# Altium PCB TSAL_Control - copia.PcbDoc (part 2 of 2)
Units mm, origin at the board's own origin, x right, y up, seen from the top; angles counter-clockwise.
Board outline 110 x 55.6 mm, 4 copper layers (Top Layer, GND, PWR, Bottom Layer), stack 1.488 mm thick; 168 components, 78 nets, 452 pads, 56 vias.
Unrouted connection lines stored in the file: 329.
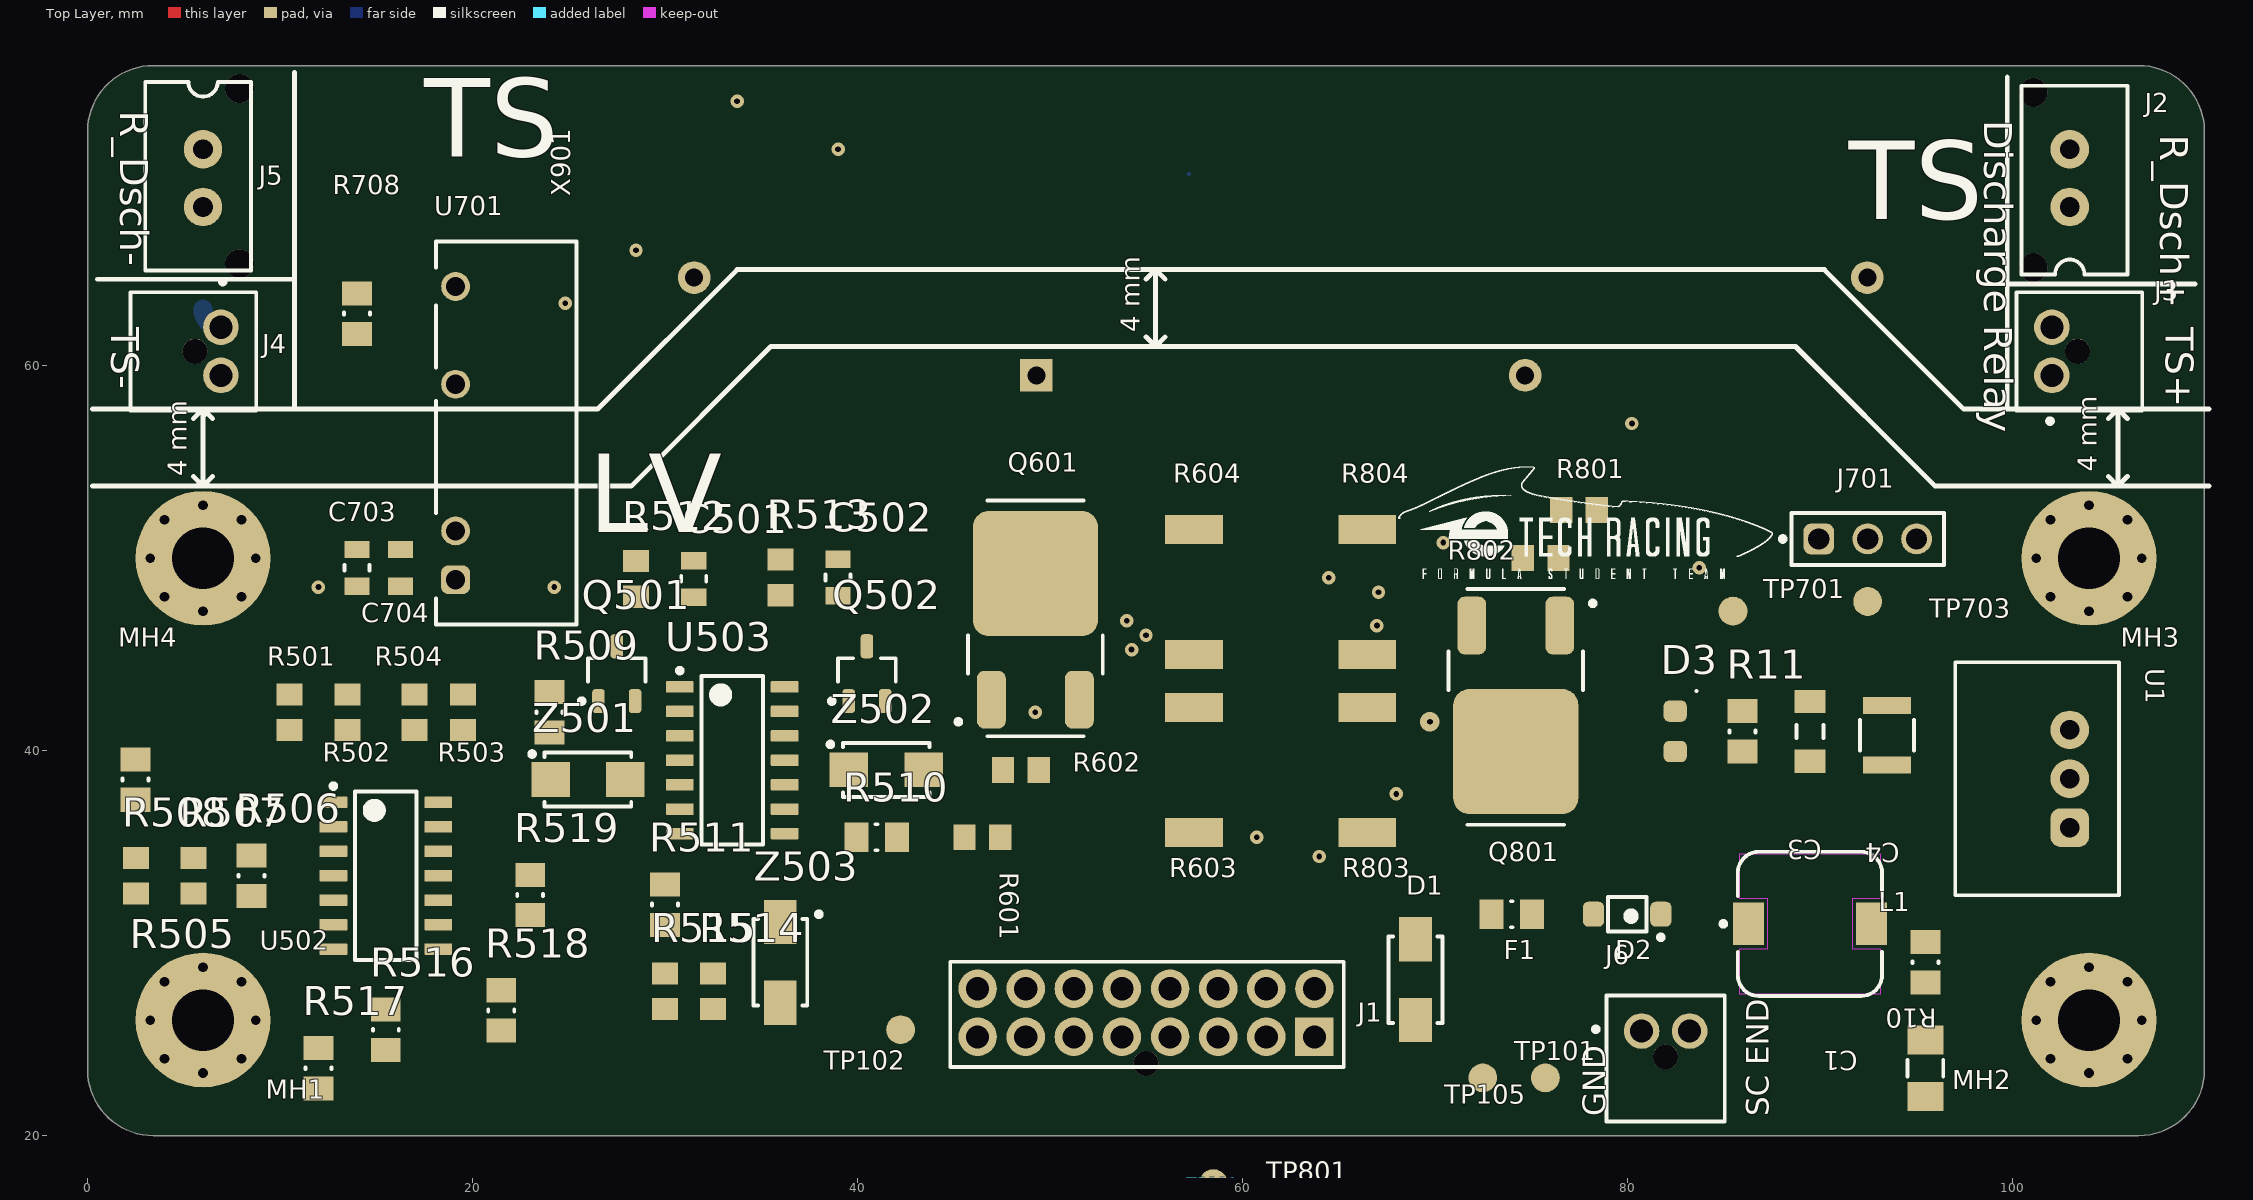
[diagram p0: Top Layer view]

## Part data (continued)
R507 R508 R514 R515 R601 R703 R709 R710 R801: library part CMP-00083-3, "Res Thick Film 0805 100 Ohm 1% 1/8W ±100ppm/°C Molded SMD SMD Paper Tape on Plastic Reel", Case Code (Metric)=2012, Case/Package=0805, Manufacturer 1=Bourns, Manufacturer Part Number 1=CR0805-FX-1000ELF, Max Operating Temperature=155°C, Max Power Dissipation=125mW, Min Operating Temperature=-55°C, Package Quantity=1, Resistance Tolerance=1%, Resistor Type="Thick Film", Temperature Coefficient=100ppm/°C, Voltage Rating=150V, .Creator=DR, Category="Chip SMD Resistors", ComponentLink1Description=https://datasheet.ciiva.com/11809/0900766b80fcdb72-11809178.pdf?src-supplier=RSComponents, ComponentLink1URL=https://datasheet.ciiva.com/11809/0900766b80fcdb72-11809178.pdf?src-supplier=RSComponents, ComponentLink2Description=https://datasheet.ciiva.com/6547/chpreztr-6547413.pdf?src-supplier=Digi-Key, ComponentLink2URL=https://datasheet.ciiva.com/6547/chpreztr-6547413.pdf?src-supplier=Digi-Key, ComponentLink3Description=https://datasheet.ciiva.com/6547/chpreztr-6547414.pdf?src-supplier=Digi-Key, ComponentLink3URL=https://datasheet.ciiva.com/6547/chpreztr-6547414.pdf?src-supplier=Digi-Key, ComponentLink4Description=https://datasheet.ciiva.com/6547/chpreztr-6547415.pdf?src-supplier=Digi-Key, ComponentLink4URL=https://datasheet.ciiva.com/6547/chpreztr-6547415.pdf?src-supplier=Digi-Key, ComponentLink5Description=https://datasheet.ciiva.com/9120/chpreztr-9120744.pdf?src-supplier=Avnet, ComponentLink5URL=https://datasheet.ciiva.com/9120/chpreztr-9120744.pdf?src-supplier=Avnet, Construction=Rectangular, Contact Plating=Tin, Depth=1.25mm, Design Item ID=R100-0805FTK, Features="Moisture Resistant", Height=0.5mm, Length=2mm, Military Standard=Not, Mount="Surface Mount", Number of Terminations=2, Packaging="Tape and Reel", Pins=2, Power rating=125mW, Pricing 1="1=0,05840, 10=0,03430, 25=0,01780, 100=0,00750, 250=0,00560, 500=0,00490, 3000=0,00470 (USD)", Radiation Hardening=No, REACH SVHC="No SVHC", RoHS=Yes, RoHS Compliant=Yes, Series=CR0805, Source=Passives.SchLib, Stock 1=49802, Technology="THICK FILM", Termination=SMD/SMT, Thickness=508um, Tolerance=1%, Voltage Rating (DC)=150V, Width=1.25mm
R509 R510 R708: library part CMP-009-00027-3, "Fixed Resistor, Metal Glaze/thick Film, 0.5W, 2000ohm, 150V, 1% +/-Tol, 100ppm/Cel, Surface Mount, 0805", Case/Package=0805, Manufacturer=Vishay, Max Operating Temperature=155°C, Min Operating Temperature=-55°C, Part Number=CRCW08052K00FKEAHP, Power=500mW, Tolerance=1%, Mounting Technology="Surface Mount", Pins=2, RoHS Compliant=Yes
R516 R517 R518 R519: library part CMP-009-00008-6, "Fixed Resistor, Metal Glaze/thick Film, 0.125W, 560000ohm, 150V, 1% +/-Tol, 100ppm/Cel, Surface Mount, 0805", Case/Package=0805, Max Operating Temperature=155°C, Min Operating Temperature=-55°C, Power=125mW, Tolerance=1%, Mounting Technology="Surface Mount", Pins=2, RoHS Compliant=Yes
R603 R604 R803 R804: library part CMP-00075-7, "Res Thick Film 2512 15 Ohm 1% 2W ±100ppm/C Pad SMD T/R", Case Code (Metric)=6432, Case/Package=2512, Manufacturer 1="TE Connectivity", Manufacturer Part Number 1=352115RFT, Max Operating Temperature=155°C, Max Power Dissipation=2W, Min Operating Temperature=-55°C, Number of Resistors=1, Resistance Tolerance=1%, Resistor Type="Thick Film,Power resistor", Temperature Coefficient=100ppm/°C, Voltage Rating=250V, .Creator=DR, Category="Chip SMD Resistors", ComponentLink1Description=Datasheet, ComponentLink1URL=https://docs.rs-online.com/8bc1/0900766b81096b90.pdf, ComponentLink2Description="Where buy it", ComponentLink2URL=https://es.rs-online.com/web/p/resistencias-de-montaje-en-superficie/7551110, ComponentLink3Description=https://datasheet.ciiva.com/25610/0900766b81096b90-25610033.pdf?src-supplier=RSComponents, ComponentLink3URL=https://datasheet.ciiva.com/25610/0900766b81096b90-25610033.pdf?src-supplier=RSComponents, ComponentLink4Description=https://datasheet.ciiva.com/46391/1610601-46391493.pdf?src-supplier=Element14, ComponentLink4URL=https://datasheet.ciiva.com/46391/1610601-46391493.pdf?src-supplier=Element14, ComponentLink5Description=https://datasheet.ciiva.com/7657/1610601-7657542.pdf?src-supplier=Element14, ComponentLink5URL=https://datasheet.ciiva.com/7657/1610601-7657542.pdf?src-supplier=Element14, Depth=3.2mm, Design Item ID=R15-2512FTK, ELV=Compliant, Features="Automotive AEC-Q200", Height=0.55mm, Length=6.3mm, Mount="Surface Mount", Number of Terminations=2, Packaging="Tape and Reel", Pricing 1="10=0,64300, 250=0,62200, 1000=0,60000, 2000=0,55400, 2500=0,52100 (USD)", REACH SVHC="No SVHC", RoHS=Yes, RoHS Compliant=Yes, Series="3521, CGS", Source=Passives.SchLib, Stock 1=1, Technology="THICK FILM", Termination=Solder, Tolerance=1%, Voltage Rating (DC)=250V
R701: library part CMP-00093-3, "Res Thick Film 0805 470 Ohm 1% 1/8W ±100ppm/°C Molded SMD SMD Paper Tape on Plastic Reel", Case Code (Metric)=2012, Case/Package=0805, Manufacturer 1=Bourns, Manufacturer Part Number 1=CR0805-FX-4700GLF, Max Operating Temperature=155°C, Max Power Dissipation=125mW, Min Operating Temperature=-55°C, Resistance Tolerance=1%, Resistor Type="Thick Film", Temperature Coefficient=100ppm/°C, Voltage Rating=150V, .Creator=DR, Category="Chip SMD Resistors", ComponentLink1Description=https://datasheet.ciiva.com/11808/0900766b80fcdb72-11808686.pdf?src-supplier=RSComponents, ComponentLink1URL=https://datasheet.ciiva.com/11808/0900766b80fcdb72-11808686.pdf?src-supplier=RSComponents, ComponentLink2Description=https://datasheet.ciiva.com/7985/1856384-7985880.pdf?src-supplier=Element14, ComponentLink2URL=https://datasheet.ciiva.com/7985/1856384-7985880.pdf?src-supplier=Element14, ComponentLink3Description=https://datasheet.ciiva.com/22693/1902866-22693247.pdf?src-supplier=Element14, ComponentLink3URL=https://datasheet.ciiva.com/22693/1902866-22693247.pdf?src-supplier=Element14, ComponentLink4Description=https://datasheet.ciiva.com/5541/chpreztr-5541930.pdf?src-supplier=Mouser, ComponentLink4URL=https://datasheet.ciiva.com/5541/chpreztr-5541930.pdf?src-supplier=Mouser, Construction=Rectangular, Contact Plating=Tin, Depth=1.25mm, Design Item ID=R470-0805FTK, Features="Moisture Resistant", Height=0.5mm, Length=2mm, Military Standard=Not, Mount="Surface Mount", Number of Terminations=2, Packaging="Tape and Reel", Pins=2, Power rating=125mW, Pricing 1="1=0,00990, 10=0,00980, 25=0,00950, 50=0,00940, 100=0,00930, 250=0,00920, 500=0,00910, 1000=0,00890, 3000=0,00870, 6000=0,00860 (USD)", Radiation Hardening=No, REACH SVHC="No SVHC", RoHS=Yes, Series=CR0805, Source=Passives.SchLib, Stock 1=12623, Technology="THICK FILM", Termination=SMD/SMT, Thickness=508um, Tolerance=1%, Voltage Rating (DC)=150V
R704 R901: library part CMP-009-00035-5, "Resistor, 10K, 0.25W, Thick Film, 0805 Rohs Compliant: Yes", Resistance=10k
R705: library part CMP-00108-3, "Current Sense Resistors - SMD 3watts .002ohms 1%", Case Code (Imperial)=2512, Case Code (Metric)=6432, Manufacturer="Vishay Dale", Manufacturer Part Number=WSLP25122L000FEA, Max Operating Temperature=170°C, Min Operating Temperature=-65°C, Package Quantity=2000, Power rating=3W, Resistance=2M, Resistor Type="Metal Strip", Temperature Coefficient=275ppm/°C, Tolerance=1%, Case/Package=2512, Category="Chip SMD Resistors", ComponentLink1Description=https://datasheet.ciiva.com/48527/wslp-48527354.pdf?src-supplier=Avnet, ComponentLink1URL=https://datasheet.ciiva.com/48527/wslp-48527354.pdf?src-supplier=Avnet, Design Item ID=R2M-2512FTK, Height=0.635mm, Lead Free="Lead Free", Length=6.4mm, Mount="Surface Mount", Packaging="Tape and Reel", Pricing 1="1=1,07000, 10=1,07000, 50=1,07000, 100=1,07000, 1000=0,77100, 10000=0,75500 (USD)", RoHS=Yes, RoHS Compliant=Yes, Series=WSLP, Size Code=2512, Source=Passives.SchLib, Stock 1=11994, Termination=SMD/SMT, Weight=0.001429oz, Width=3.2mm
R707: library part CMP-009-00018-5, "Fixed Resistor, Metal Glaze/thick Film, 0.125W, 51000ohm, 150V, 1% +/-Tol, 100ppm/Cel, Surface Mount, 0805. ERJ-6ENF5102V", Case/Package=0805, Max Operating Temperature=155°C, Min Operating Temperature=-55°C, Power=125mW, Tolerance=1%, Mounting Technology="Surface Mount", Pins=2, RoHS Compliant=Yes
TP101 TP102 TP103 TP104 TP105 TP106 TP107 TP108 TP109 TP201 TP202 TP203 TP204 TP301 TP302 TP303 TP304 TP305 TP401 TP402 TP501 TP502 TP503 TP504 TP505 TP506 TP507 TP508 TP509 TP510 TP511 TP512 TP513 TP601 TP602 TP701 TP702 TP703 TP704 TP705 TP801 TP802 TP901: library part CMP-00042-2, "Test Point 1x1 mm", .Creator=GP, .PCBcheck=GP, .SCHcheck=GP, Category=TestPoint, Design Item ID=TestPoint, Source=e-Tech_Racing.SchLib
U1: library part CMP-019-00006-2, "Switching Regulator 36V In / 12 V Out, 1A. 173011235", RoHS Compliant=Yes
U101 U302: library part CMP-00213-1, "AND Gate, 4000/14000/40000 Series, 3-Func, 3-Input, CMOS, PDSO14", Case/Package=SOP, Load Capacitance (CL)=50pF, Max Operating Temperature=125°C, Max Supply Voltage=18V, Min Operating Temperature=-55°C, Min Supply Voltage=3V, Nominal Supply Voltage=5V, Package Body Material=Plastic, Package Equivalence Code=SOP14,.25, Package Shape=Rectangular, Package Style="SMALL OUTLINEMeter", Peak Reflow Temperature (Cel)=260°C, Power Supplies=5/15V, Temperature Grade=MILITARY, Channels=3, Height - Seated (Max)=1.75mm, JESD-30 Code=R-PDSO-G14, JESD-609 Code=e4, Length=8.65mm, Load/Preset Input=Yes, Logic Type="AND GATE", Moisture Sensitivity Level=1, Number of Inputs=3, Packaging=Rail/Tube, Pins=14, Prop. Delay@Nom-Sup=250ns, Propagation Delay (tpd)=250ns, Qualification Status="Not Qualified", Reach SVHC Compliant=Yes, RoHS Compliant=Yes, Schmitt Trigger=No, Surface Mount=Yes, Technology=CMOS, Terminal Finish=Nickel, Terminal Form="Gull Wing", Terminal Pitch=1.27mm, Terminal Position=DUAL, Width=3.9mm
U201 U501: library part CMP-00217-1, "OR Gate, 4000/14000/40000 Series, 2-Func, 4-Input, CMOS, PDSO14", Case/Package=SOP, Load Capacitance (CL)=50pF, Max Operating Temperature=125°C, Max Supply Voltage=18V, Min Operating Temperature=-55°C, Min Supply Voltage=3V, Nominal Supply Voltage=5V, Package Body Material=Plastic, Package Equivalence Code=SOP14,.25, Package Shape=Rectangular, Package Style="SMALL OUTLINEMeter", Peak Reflow Temperature (Cel)=260°C, Power Supplies=5/15V, Temperature Grade=MILITARY, Channels=2, Height - Seated (Max)=1.75mm, JESD-30 Code=R-PDSO-G14, JESD-609 Code=e4, Length=8.65mm, Logic Type="OR GATE", Moisture Sensitivity Level=1, Number of Inputs=4, Output Characteristics=OPEN-COLLECTOR, Packaging=Rail/Tube, Pins=14, Prop. Delay@Nom-Sup=250ns, Propagation Delay (tpd)=250ns, Qualification Status="Not Qualified", Reach SVHC Compliant=Yes, RoHS Compliant=Yes, Schmitt Trigger=No, Surface Mount=Yes, Technology=CMOS, Terminal Finish=Nickel, Terminal Form="Gull Wing", Terminal Pitch=1.27mm, Terminal Position=DUAL, Width=3.9mm
U202: library part CMP-00211-1, "NAND Gate, 4000/14000/40000 Series, 4-Func, 2-Input, CMOS, PDSO14", Case/Package=SOP, Load Capacitance (CL)=50pF, Max Operating Temperature=125°C, Max Supply Voltage=18V, Min Operating Temperature=-55°C, Min Supply Voltage=3V, Nominal Supply Voltage=5V, Package Body Material=Plastic, Package Equivalence Code=SOP14,.25, Package Shape=Rectangular, Package Style="SMALL OUTLINEMeter", Peak Reflow Temperature (Cel)=260°C, Power Supplies=5/15V, Temperature Grade=MILITARY, Channels=4, Height - Seated (Max)=1.75mm, JESD-30 Code=R-PDSO-G14, JESD-609 Code=e4, Length=8.65mm, Load/Preset Input=Yes, Logic Type="NAND GATE", Moisture Sensitivity Level=1, Number of Inputs=2, Packaging="Tape and Reel", Pins=14, Prop. Delay@Nom-Sup=250ns, Propagation Delay (tpd)=250ns, Qualification Status="Not Qualified", Reach SVHC Compliant=Yes, RoHS Compliant=Yes, Schmitt Trigger=No, Surface Mount=Yes, Technology=CMOS, Terminal Finish=Nickel, Terminal Form="Gull Wing", Terminal Pitch=1.27mm, Terminal Position=DUAL, Width=3.9mm
U301: library part CMP-00216-1, "XOR Gate, 4000/14000/40000 Series, 4-Func, 2-Input, CMOS, PDSO14", Case/Package=SOP, Load Capacitance (CL)=50pF, Max Operating Temperature=125°C, Max Supply Voltage=18V, Min Operating Temperature=-55°C, Min Supply Voltage=3V, Nominal Supply Voltage=5V, Package Body Material=Plastic, Package Equivalence Code=SOP14,.25, Package Shape=Rectangular, Package Style="SMALL OUTLINEMeter", Peak Reflow Temperature (Cel)=260°C, Power Supplies=5/15V, Temperature Grade=MILITARY, Channels=4, Height - Seated (Max)=1.75mm, JESD-30 Code=R-PDSO-G14, JESD-609 Code=e4, Length=8.65mm, Logic Type="XOR GATE", Moisture Sensitivity Level=1, Number of Inputs=2, Packaging="Tape and Reel", Pins=14, Prop. Delay@Nom-Sup=280ns, Propagation Delay (tpd)=280ns, Qualification Status="Not Qualified", Reach SVHC Compliant=Yes, RoHS Compliant=Yes, Schmitt Trigger=No, Surface Mount=Yes, Technology=CMOS, Terminal Finish=Nickel, Terminal Form="Gull Wing", Terminal Pitch=1.27mm, Terminal Position=DUAL, Width=3.9mm
U401: library part CMP-00215-1, "NAND Gate, 4000/14000/40000 Series, 3-Func, 3-Input, CMOS, CDIP14", Case/Package=DIP, Max Operating Temperature=125°C, Max Supply Voltage=15V, Min Operating Temperature=-55°C, Min Supply Voltage=5V, Nominal Supply Voltage=10V, Package Body Material=Metal, Package Shape=Rectangular, Package Style=IN-LINEMeter, Temperature Grade=MILITARY, Channels=3, Height - Seated (Max)=5.08mm, Logic Type="NAND GATE", Number of Inputs=3, Pins=14, Propagation Delay (tpd)=250ns, Qualification Status="Not Qualified", Surface Mount=No, Technology=CMOS, Terminal Form="Through Hole", Terminal Pitch=2.54mm, Terminal Position=DUAL, Width=7.62mm
U502 U503 U703: library part CMP-014-00006-1, "Comparator, 4 Func, 5000uV Offset-Max, 300ns Response Time, BIPolar, PDSO14", Case/Package=SOP, Max Operating Temperature=70°C, Min Operating Temperature=0°C, Nominal Supply Voltage=5V, Channels=4, Output Type=OPEN-COLLECTOR, Pins=14, RoHS Compliant=Yes
U701: library part CMP-019-00001-3, "WPME-FISM Fixed Isolated SIP/SMT Module"
U702: library part CMP-00181-3, "Precision timer for -55 to 85C operation 8-SOIC -40 to 85", Case/Package=SOIC, Frequency=500kHz, High Level Output Current=-200mA, Low Level Output Current=200mA, Manufacturer="Texas Instruments", Manufacturer Part Number=SA555D, Max Operating Temperature=85°C, Max Supply Voltage=16V, Min Operating Temperature=-40°C, Min Supply Voltage=4.5V, Nominal Supply Current=2mA, Operating Supply Current=10mA, Package Quantity=75, Quiescent Current=15mA, .Creator=DO, Category="Timers and Oscillators", ComponentLink1Description=https://datasheet.ciiva.com/1147/na555-1147816.pdf?src-supplier=Newark, ComponentLink1URL=https://datasheet.ciiva.com/1147/na555-1147816.pdf?src-supplier=Newark, ComponentLink2Description=https://datasheet.ciiva.com/14094/ne555-series-eng-tds-14094951.pdf?src-supplier=Distrelec, ComponentLink2URL=https://datasheet.ciiva.com/14094/ne555-series-eng-tds-14094951.pdf?src-supplier=Distrelec, ComponentLink3Description=https://datasheet.ciiva.com/1233/sa555-1233455.pdf?src-supplier=Digi-Key, ComponentLink3URL=https://datasheet.ciiva.com/1233/sa555-1233455.pdf?src-supplier=Digi-Key, ComponentLink4Description=https://datasheet.ciiva.com/1139/1851962-1139987.pdf?src-supplier=Element14, ComponentLink4URL=https://datasheet.ciiva.com/1139/1851962-1139987.pdf?src-supplier=Element14, ComponentLink5Description=https://datasheet.ciiva.com/15152/getdatasheetpartid-75292-15152565.pdf?src-supplier=Verical, ComponentLink5URL=https://datasheet.ciiva.com/15152/getdatasheetpartid-75292-15152565.pdf?src-supplier=Verical, ComponentLink6Description="Where buy it", ComponentLink6URL=https://www.mouser.es/ProductDetail/Texas-Instruments/SA555D?qs=gb35HGp1gQJkvy2FEVqR%2Fw%3D%3D, Contact Plating=Gold, Design Item ID=Timer_SA555, Height=1.58mm, Lead Free="Lead Free", Length=4.9mm, Mount="Surface Mount", Number of Pins=8, Number of Timers/Counters=1, Packaging=Rail/Tube, Pricing 1="1=0,93000, 10=0,83500, 25=0,79240, 100=0,65090, 250=0,60848, 500=0,53774, 1000=0,46725 (USD)", Radiation Hardening=No, REACH SVHC="No SVHC", RoHS=Yes, RoHS Compliant=Yes, Source="Integrated circuits.SchLib", Stock 1=1162, Weight=0.002561oz, Width=3.91mm
U901: library part CMP-00229-1, "Transistor Output SSR", Optoelectronic Device Type="TRANSISTOR OUTPUT SSR", Reach SVHC Compliant=Yes
X901: library part CMP-00224-4, "Dry Reed Relay, SPST-NC, 3500V switching voltage, 3A, 10kV isolation coil-contacts, 5504-24-1", JESD-609 Code=e3, Reach SVHC Compliant=Yes, Relay Type="DRY REED RELAY", RoHS Compliant=Yes, Terminal Finish=Tin
Z1 Z2 Z3 Z4: library part CMP-00159-3, "Diode Zener Single 10V 2% 500mW 2-Pin SOD-123 T/R", Case/Package=3000, Manufacturer=Vishay, Manufacturer Part Number=MMSZ5240C-HE3-08, Max Operating Temperature=150°C, Max Power Dissipation=500mW, Max Reverse Leakage Current=3uA, Min Operating Temperature=-55°C, Tolerance=2%, Zener Current=20mA, Zener Voltage=10V, .Creator=DO, Category="Zener Diodes", ComponentLink1Description=http://www.mouser.com/ds/2/427/mmsz5225-102133.pdf?src-supplier=Mouser, ComponentLink1URL=http://www.mouser.com/ds/2/427/mmsz5225-102133.pdf?src-supplier=Mouser, ComponentLink2Description=http://components.arrow.com/part/dataview/59571956S617370N5680?src-supplier=Arrow+Electronics, ComponentLink2URL=http://components.arrow.com/part/dataview/59571956S617370N5680?src-supplier=Arrow+Electronics, ComponentLink3Description=http://www.vishay.com/docs/85774/mmsz5225.pdf?src-supplier=Digi-Key, ComponentLink3URL=http://www.vishay.com/docs/85774/mmsz5225.pdf?src-supplier=Digi-Key, ComponentLink4Description="Where buy it", ComponentLink4URL=https://www.mouser.es/ProductDetail/Vishay-Semiconductors/MMSZ5240C-HE3-08?qs=ESFF34UzhwiGAVchySN1uQ%3D%3D, Design Item ID=DZ-0.01/75-SOD-123, Element Configuration=Single, Impedance=17R, Mount="Surface Mount", Packaging="Tape and Reel", Pins=2, Power Dissipation=500mW, Pricing 1="1=0,36000, 10=0,29800, 50=0,29800, 100=0,15800, 1000=0,07100, 10000=0,04700 (USD)", RoHS=Yes, RoHS Compliant=Yes, Source="Filter components.SchLib", Stock 1=4964, Voltage Tolerance=2%, Weight=0.000363oz
Z501 Z502: library part CMP-004-00007-3, "Zener Diode, 5.6V V(Z), 5%, 0.5W, Silicon, Unidirectional, DO-214AC", Max Operating Temperature=150°C, Min Operating Temperature=-65°C, Zener Voltage=5V6, Pins=2, RoHS Compliant=Yes
Z503: library part CMP-004-00020-2, "Zener Diode, 3.6V V(Z), 5.56%, 1.25W, Silicon, Unidirectional, DO-214AC, BZG05C3V6-M3-08", Max Operating Temperature=150°C, Zener Voltage=3V6, Pins=2, RoHS Compliant=Yes

## Via types
v1: diameter 0.7, hole 0.5, Top Layer to Bottom Layer, tented both sides, 32 vias
v2: diameter 0.7, hole 0.3, Top Layer to Bottom Layer, tented both sides, 19 vias
v3: diameter 1.5, hole 1.5, Top Layer to Bottom Layer, tented both sides, 4 vias
v4: diameter 1, hole 0.3, Top Layer to Bottom Layer, tented both sides, 1 vias

## Nets (pads, with @x,y where several pads share a name; then routed paths per layer and width w, separated by ;. In a path a pad name is that pad's centre, name@x,y a point inside that pad or via, vN(x,y) a via of type N, cw(c..) or ccw(c..) an arc to the next point about the centre after c; other vN are vias at no path point)
+5TS: C701.1 C702.1 R701.1 R704.1 U701.4 U703.3 | length 33.1
  PWR w0.5: 14,65.25 22.825,65.25 cw(c22.825,63.25) v2(24.825,63.25) 24.825,68.71 cw(c27.365,68.71) 27.365,71.25 v2(39,71.25)
+12: C3.1 C4.1 C101.1 C111.2 C203.1 C204.1 C301.1 C302.1 C401.1 C501.1 C502.1 C503.1 C504.1 C505.1 C703.1 C704.1 J1.7 Q202.G R1.1 R11.1 R202.1 R501.1 R502.1 R503.1 R504.1 R505.1 R511.1 R512.1 R513.1 R702.1 R703.1 U1.3 U101.14 U201.14 U202.14 U301.14 U302.1 U302.14 U401.14 U501.14 U502.3 U503.3 U701.1 U702.8
  other v2: 49.25,42 54,46.75 12,48.5 24.25,48.5 64.49,48.982 70.44,50.81 80.25,57
  other v4: 69.75,41.5
AIR+_Coil: R3.2 TP106.1 U301.1 U401.8 Z1.K
AIR+_Coil_30V: J1.10 R3.1
AIR+_Implausibility: TP301.1 U201.9 U301.3
AIR+_SCS: R504.2 TP506.1 U401.12 U502.13
AIR+_State: J1.1 R519.1 TP102.1 U101.1 U301.2 U502.11
AIR-_Coil: R5.2 TP108.1 U301.5 U401.1 Z2.K | length 17.7
  GND w0.2: v2(55,46) 55.034,45.966 62.034,45.966 66.534,41.466 66.534,39.216 v2(68,37.75)
AIR-_Coil_30V: J1.11 R5.1
AIR-_Implausibility: TP302.1 U201.10 U301.4
AIR-_SCS: R501.2 TP507.1 U401.4 U502.1
AIR-_State: J1.2 R516.1 TP104.1 U101.2 U301.6 U502.7
Discharge_Resistor: J2.1 J2.2 U901.5 X901.1
GateGREEN_DRV: Q601.G R601.2 R602.1 TP602.1
GateGREEN_SCS: Q502.G R510.1 TP510.1 Z502.K
GateRED_DRV: Q801.G R801.2 R802.1 TP802.1
GateRED_SCS: Q501.G R509.2 TP505.1 Z501.K
GND: C1.2 C3.2 C4.2 C101.2 C201.2 C202.2 C203.2 C204.2 C223.2 C301.2 C302.2 C333.2 C401.2 C444.2 C503.2 C504.2 C505.2 C555.2 C703.2 C704.2 C705.2 C706.2 D1.2 D3.K D901.A J1.8 J6.1 MH1.1 MH2.1 MH3.1 MH4.1 Q1.S Q601.S Q701.3 Q801.S R2.2 R203.2 R204.2 R506.2 R507.2 R508.2 R514.2 R515.2 R516.2 R517.2 R518.2 R519.2 R602.2 R802.2 U1.2 U101.7 U201.5 U201.7 U201.12 U202.7 U301.7 U302.7 U401.7 U501.7 U502.12 U503.12 U701.2 U702.1 U901.3 X901.3 Z1.A Z2.A Z3.A Z4.A Z503.A
  other v1: 6,23.25 104,23.25 4,24 8,24 102,24 106,24 3.25,26 8.75,26 101.25,26 106.75,26 4,28 8,28 102,28 106,28 6,28.75 104,28.75 6,47.25 104,47.25 4,48 8,48 102,48 106,48 3.25,50 8.75,50 101.25,50 106.75,50 4,52 8,52 102,52 106,52 6,52.75 104,52.75
GreenDRV_SCS: C502.2 Q502.D R513.2 TP512.1 U401.13
HV_Accu_SCS: R503.2 TP502.1 U401.5 U502.14
HV_Accumulator: J1.4 R518.1 TP105.1 U101.8 U302.3 U502.9 | length 60.8
  GND w0.2: J1.4 52.225,25.131 51.605,25.751 51.439,25.751 50.154,24.466 42.034,24.466 40.534,25.966 40.534,41.716 48.515,49.697 65.615,49.697 v2(67.081,48.231)
HV_Detection_DCBus: J701.1 Q701.4 R702.2
HV_Detection_Trigger: J701.2 R509.1 TP703.1 U702.4
Implausibilities: C201.1 Q201.S R201.2 TP202.1 U202.1
Implausibilities_Undelayed: C223.1 Q201.G R201.1 TP201.1 U201.1 U202.2
INV_HV_Detection: J701.3 Q1.D R1.2
INV_HV_Detection5V: J1.6 Q1.G R2.1
Latch_Reset: C202.1 Q202.S R202.2 TP203.1 U202.13
LV+_in: D1.1 F1.1 J1.16
NetC1_1: C1.1 R10.2
NetC705_1: C705.1 U702.5
NetC706_1: C706.1 R706.2 U702.2 U702.6
NetD2_A: D2.A F1.2
NetD2_K: D2.K L1.1
NetD3_A: D3.A R11.2
NetL1_2: L1.2 R10.1 U1.1
NetQ201_D: Q201.D R203.1
NetQ202_D: Q202.D R204.1
NetQ601_D: Q601.D R604.2
NetQ801_D: Q801.D R804.2
NetR603_2: R603.2 R604.1
NetR703_2: R703.2 R706.1 U702.7
NetR803_2: R803.2 R804.1
NetR901_2: R901.2 TP901.1 U901.2
NetU101_4: U101.4 U101.9
No_Voltage_Relays_Closed: C444.1 TP402.1 U201.3 U302.6
Not_Intentional_Relay_State: TP401.1 U302.5 U401.9
Not_Safe_State: U202.10 U202.12
Out_HV_Comparator: Q701.1 R701.2 TP702.1 U703.14 | length 20.6
  GND w0.2: v2(28.5,66) 27.25,67.25 ; 30.54,73.75 ccw(c30.54,70.244) 27.034,70.244 27.034,67.466 27.25,67.25 ; v2(33.75,73.75) ccw(c33.75,67.25) 27.25,67.25
Precharge_Coil: R7.2 TP107.1 U301.9 U401.2 Z3.K | length 12.4
  GND w0.2: v2(54.25,45.25) 59.284,40.216 59.284,36.966 v2(60.75,35.5)
Precharge_Coil_30V: J1.12 R7.1
Precharge_Implausibility: TP303.1 U201.11 U301.10
Precharge_SCS: R502.2 TP509.1 U401.3 U502.2
Precharge_State: J1.3 R517.1 TP103.1 U101.3 U301.8 U502.5
RedDRV_SCS: C501.2 Q501.D R512.2 TP508.1 U202.5 U202.6
Relays_Implausibility: C333.1 TP305.1 U201.2 U302.9
Relays_State_Detection: TP304.1 U201.13 U302.8
Safe_State: C111.1 TP204.1 U101.5 U202.9 U202.11
Safe_State_Unlatched: U202.3 U202.8
SC_End: R9.2 TP109.1 U302.2 U302.4 Z4.K
  other v2: 64,34.5 67,46.5
SC_End_30V: D901.K J1.13 J6.2 R9.1 R901.1 X901.2
SCS_Error: TP511.1 U201.4 U501.1
SCS_Signals1: U401.6 U401.11 U501.2
SCS_Signals2: U401.10 U501.3
SCS_Signals3: C555.1 U202.4 U501.4
SourceGREEN_SCS: Q502.S TP513.1 U503.13 Z502.A
SourceRED_SCS: Q501.S TP503.1 U503.1 Z501.A
TS+_DCBus1: F3.1 R705.1
TS+_DCBus1_Unfused: F3.2 J3.1 J3.2 U901.6 X901.4
TS-: C701.2 C702.2 J4.1 J4.2 J5.1 J5.2 Q701.2 R707.2 R708.2 R709.2 R710.2 U701.3 U703.12 | length 1.5
  Bottom Layer w1: 6,62.93 ccw(c6.93,62.93) J4.1
TS_Off: J1.5 R510.2 R601.1 TP101.1 U101.6 | length 20.5
  GND w0.2: 37.544,26.206 40.284,23.466 53.784,23.466 54.44,24.121 55.046,24.121 56.055,25.131 J1.5
TS_On: J1.15 R801.1 TP701.1 U702.3
  other v2: 83.75,49.5
TSAL_Green: J1.9 R603.1 TP601.1 U503.11
TSAL_Red: J1.14 R803.1 TP801.1 U503.7
V_REF: R505.2 R506.1 R507.1 R508.1 TP501.1 U502.4 U502.6 U502.8 U502.10
V_REF_Drivers: R511.2 R514.1 R515.1 TP504.1 U503.6 U503.10 Z503.K
Voltage_DCBus1: R705.2 R707.1 TP705.1 U703.8
VREF_HV_Detection: R704.2 R708.1 R709.1 R710.1 TP704.1 U703.9
pads on no net: J1.A J3. J4. J6. U101.10 U101.11 U101.12 U101.13 U201.6 U201.8 U301.11 U301.12 U301.13 U302.10 U302.11 U302.12 U302.13 U501.5 U501.6 U501.8 U501.9 U501.10 U501.11 U501.12 U501.13 U503.2 U503.4 U503.5 U503.8 U503.9 U503.14 U703.1 U703.2 U703.4 U703.5 U703.6 U703.7 U703.10 U703.11 U703.13 U901.1 U901.4
copper on no net: | length 0.1
  Bottom Layer w0.2: 57.2,69.95 ccw(c57.2,70) 57.25,70
  other v3: 101.1,65.1 7.9,65.3 101.1,74.2 7.9,74.4

## Polygon pours and split planes (outlines as drawn)
+12 on PWR "+12_L03_P008" (solid, pour order 8): 3.414,20 cw(c3.414,23.414) 0,23.414 0,72 0,72.186 cw(c3.414,72.186) 3.414,75.6 106.5,75.6 106.586,75.6 cw(c106.586,72.186) 110,72.186 110,72 110,23.414 cw(c106.586,23.414) 106.586,20 106.5,20
GND on GND "GND_L02_P007" (solid, pour order 7): 3.414,20 cw(c3.414,23.414) 0,23.414 0,72 0,72.186 cw(c3.414,72.186) 3.414,75.6 106.5,75.6 106.586,75.6 cw(c106.586,72.186) 110,72.186 110,72 110,23.414 cw(c106.586,23.414) 106.586,20 106.5,20

## Other copper
Top Layer:
  pour cut-out: 0,75.5 0,53.5 28,53.5 35.5,61 88.75,61 96.25,53.5 110,53.5 110,75.5
GND:
  pour cut-out: 110,53.75 96,53.75 88.75,61 35.5,61 28.25,53.75 0,53.75 0,75.5 110,75.5
PWR:
  pour cut-out: 110,53.75 96,53.75 88.75,61 35.5,61 28.25,53.75 0,53.75 0,75.5 110,75.5
  pour cut-out: 18.081,49.52 18.242,49.718 18.625,49.718 19.698,49.718 20.258,49.158 20.258,47.762 19.728,47.233 18.272,47.233 17.773,47.732 17.773,49.212
  pour cut-out: 85.295,43.95 85.978,43.95 86.625,43.303 86.625,42.097 86.063,41.535 84.857,41.535 84.21,42.182 84.21,43.218 84.942,43.95
Bottom Layer:
  pour cut-out: 0,75.5 0,53.5 28,53.5 35.5,61 88.75,61 96.25,53.5 110,53.5 110,75.5

## Silkscreen, mask and mechanical layers (free items; w line width, h text height)
Top Overlay:
  drawing of 66 lines, arcs and shapes, not listed
  text "R_Dsch-" at 1.208,73.248 h2.5 r270
  text "Discharge Relay" at 98.067,72.748 h2.5 r270
  text "R_Dsch+" at 107.208,71.998 h2.5 r270
  text "TS" at 17.506,69.5 h7
  text "TS" at 91.506,66.25 h7
  text "TS-" at 0.75,61.998 h2.5 r270
  text "TS+" at 107.5,61.998 h2.5 r270
  text "4 mm" at 55,61.75 h1.7 r90
  text "4 mm" at 104.75,54.5 h1.7 r90
  text "4 mm" at 5.5,54.25 h1.7 r90
  text "LV" at 26.006,50 h7
  text "GND" at 79.25,21 h2 r90
  text "SC END" at 87.75,21.002 h2 r90
Bottom Overlay:
  drawing of 31 lines, arcs and shapes, not listed
  text "TS" at 49.504,68.659 h7
  text "4 mm" at 54.75,64.5 h1.7 r90
  text "TS" at 99.744,61 h7
  text "TS" at 12.994,59 h7
  text "4 mm" at 104.75,57.5 h1.7 r90
  text "4 mm" at 5.25,57 h1.7 r90
  text "LV" at 87.744,56.75 h7
  text "TSAL CONTROL 2025" at 108.748,41.5 h2.5
  text "Guillem Ropero" at 108.75,39.775 h2.5
  text "LV" at 20.744,23 h7
Mechanical 1:
  lines w1: 0,72 0,23.414 ccw(c3.414,23.414) 3.414,20 106.5,20 ; 0,72.186 cw(c3.414,72.186) 3.414,75.6 106.5,75.6 ; 106.586,20 ccw(c106.586,23.414) 110,23.414 110,72 ; 106.586,75.6 cw(c106.586,72.186) 110,72.186

## Text inside footprints (layer, text, board x,y; h text height)
U901: Top Overlay "6.35mm" at 107.25,87.5 h0.7 r90